# Altium PCB PCB1.PcbDoc
Units mm, origin at the board's own origin, x right, y up, seen from the top; angles counter-clockwise.
Board outline 152.4 x 101.6 mm, 2 copper layers (Top Layer, Bottom Layer); 63 components, 45 nets, 205 pads, 0 vias.
Unrouted connection lines stored in the file: 125.
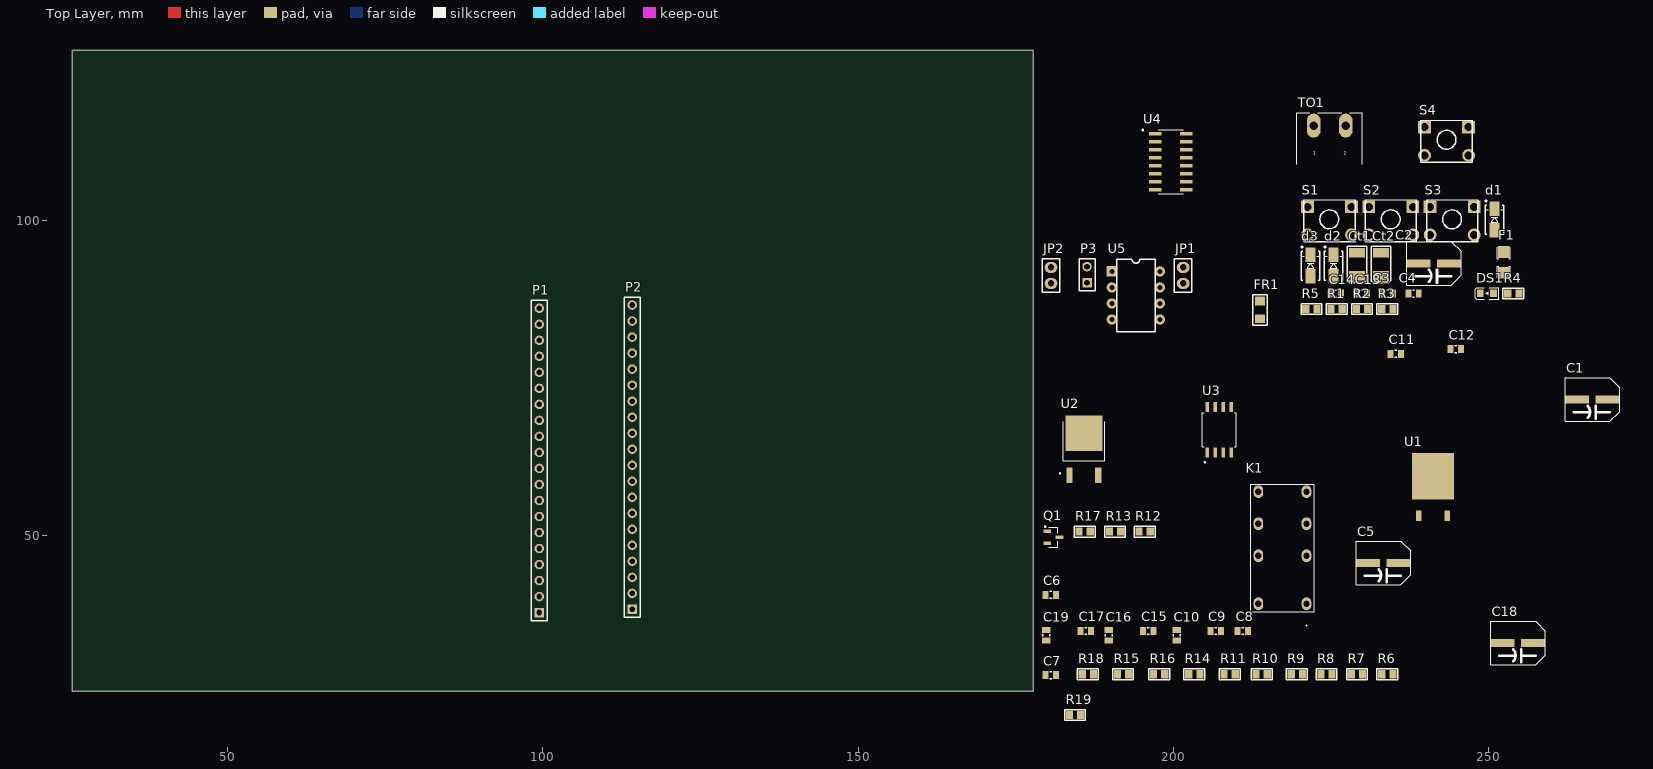
[diagram p0: Top Layer view]
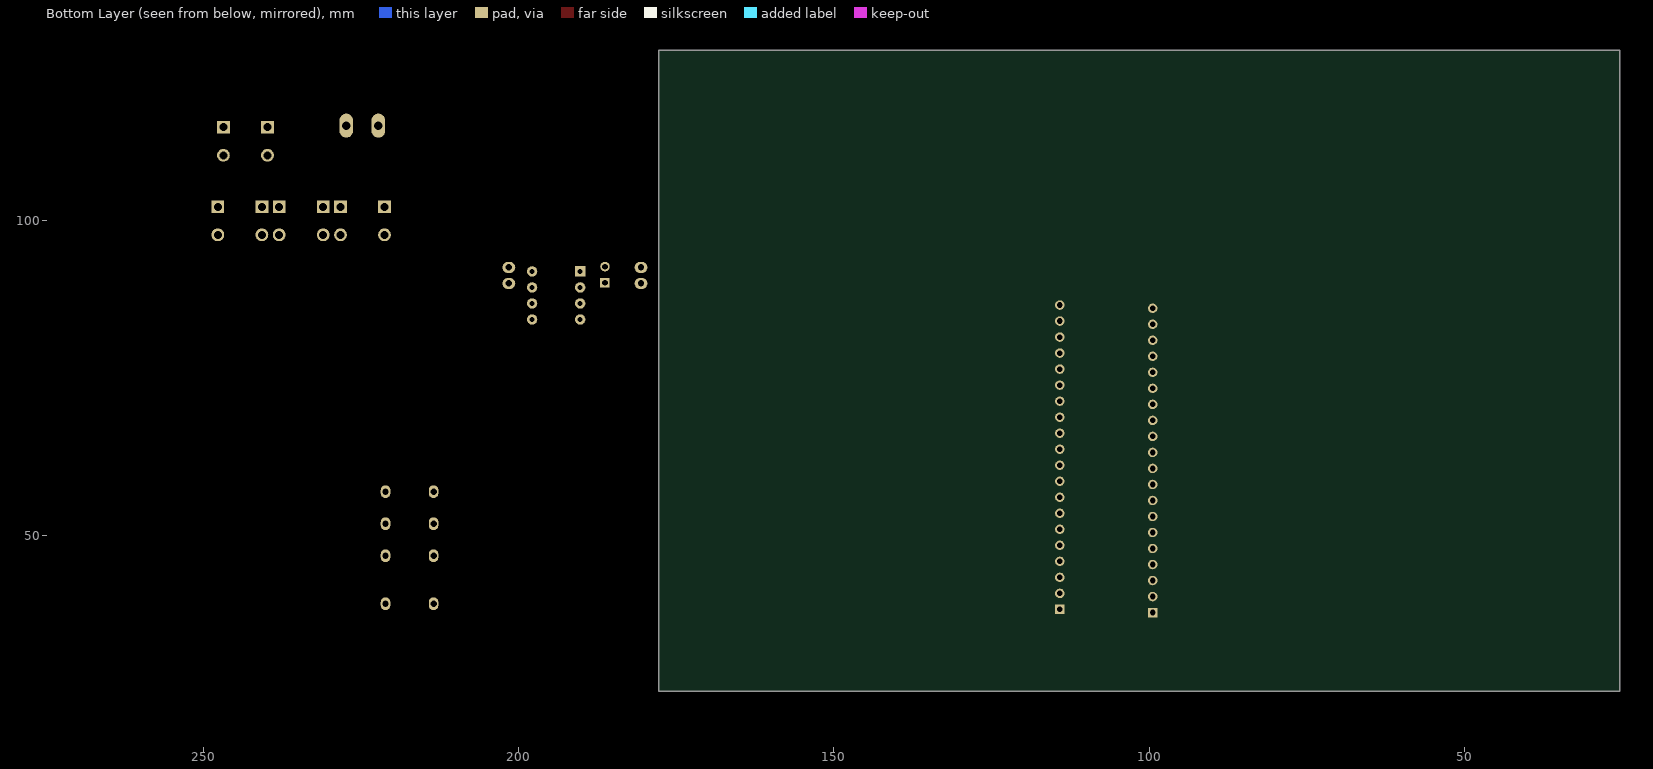
[diagram p1: Bottom Layer view, seen from below]

## Layer stack, top to bottom
Top Solder: solder mask 0.0102, Solder Resist, Dk 3.5
Top Layer: signal copper 0.0356
Dielectric 1: dielectric 0.32, FR-4, Dk 4.8
Bottom Layer: signal copper 0.0356
Bottom Solder: solder mask 0.0102, Solder Resist, Dk 3.5

## Board outline
25.4,25.4 177.8,25.4 177.8,127 25.4,127

## Design rules (kind name [scope] priority, off if disabled: settings)
Clearance [All] p1: gap=0.254 ignorepadtopadclearanceinfootprint=FALSE except(0: Arc-Hole Track-Hole SMDPad-Hole THPad-Hole Via-Hole Fill-Hole Poly-Hole Region-Hole Text-Hole)
PolygonConnect [All] p1: connectstyle=Relief reliefconductorwidth=0.254 reliefentries=4 polygonreliefangle="90 Angle" airgapwidth=0.254
RoutingVias [All] p1: holewidth=0.711 width=1.27 viastyle="Through Hole" minholewidth=0.711 minwidth=1.27 maxholewidth=0.711 maxwidth=1.27
SolderMaskExpansion [All] p1: expansion=0.102 istentingtop=FALSE
Width [All] p1: maxlimit=0.254 minlimit=0.254 preferedwidth=0.254
30 further rules are at their usual default settings.

## Classes and differential pairs
component class other: C8 C9 C10 C12 C13 C15 C16 C18 C19 JP1 JP2 K1 P3 Q1 R2 R4 R7 R8 R9 R10 R11 R12 R13 R14 R15 R16 R17 R18 R19 S1 S2 S3 S4 U4 U5
component class power: C1 C2 C3 C4 C5 C6 Ct1 Ct2 d1 d2 d3 DS1 F1 FR1 R1 TO1 U1 U2
component class MCU: C7 P1 P2 U3

## Components (designator, comment, footprint, x,y, rotation, side; value= is the part's Value field where it differs from the comment)
C1 "100uF, 25V" "Elko D8 package" 264.033,71.628 r0 top
C2 "100uF, 25V" "Elko D8 package" 238.887,93.218 r0 top
C3 "" CAP805 233.155,88.433 r0 top value=100nF
C4 "" CAP805 237.263,88.433 r0 top value=100nF
C5 "100uF, 25V" "Elko D8 package" 230.886,45.72 r0 top
C6 "" CAP805 179.705,40.64 r0 top value=100nF
C7 "" CAP805 179.705,27.94 r0 top value=100nF
C8 "" CAP805 210.185,34.925 r0 top value=100nF
C9 "" CAP805 205.867,34.925 r0 top value=1uF
C10 "" CAP805 200.533,33.401 r90 top value=1uF
C11 "" CAP805 234.459,78.862 r0 top value=100nF
C12 "" CAP805 243.967,79.629 r0 top value=100nF
C13 "" CAP805 229.047,88.433 r0 top value=100nF
C14 "" CAP805 224.939,88.433 r0 top value=100nF
C15 "" CAP805 195.199,34.925 r0 top value=1uF
C16 "" CAP805 189.738,33.401 r90 top value=1uF
C17 "" CAP805 185.293,34.925 r0 top value=100nF
C18 "100uF, 25V" "Elko D8 package" 252.222,33.02 r0 top
C19 "" CAP805 179.832,33.401 r90 top value=100nF
Ct1 "10uF" "Tantalium Size B" 229.113,93.066 r90 top
Ct2 "10uF" "Tantalium Size B" 232.925,93.066 r90 top
d1 "SS34" DIOM4629X24N 250.93,100.18 r90 top
d2 "Smbj12v" DIOM4629X24N 225.403,92.868 r90 top
d3 "Smbj3.3" DIOM4629X24N 221.745,92.868 r90 top
DS1 "Red" LED_SMD_0805 249.716,88.454 r0 top
F1 "F=1.0 A" "1206 FUSE" 252.399,93.391 r90 top
FR1 "Ferrit Bead" "1206 Ferrit Bead" 213.741,85.852 r90 top
JP1 "Jumper" "Jumper Small - 2.54 - GRAY" 201.549,91.313 r90 top
JP2 "Jumper" "Jumper Small - 2.54 - GRAY" 180.594,91.313 r90 top
K1 "G6A-234P-ST-US_5DC" G6A234PSTUS5DC 221.107,39.243 r90 top
P1 "Header 20" HDR1X20 99.441,37.846 r90 top
P2 "Header 20" HDR1X20 114.173,38.354 r90 top
P3 "Header 2" HDR1X2 186.309,90.17 r90 top
Q1 "BC817" SOT95P230X110-3N 180.975,49.784 r0 top
R1 "2.2k" "0805 Resistor" 225.906,86 r0 top
R2 "10k" "0805 Resistor" 229.916,86 r0 top
R3 "10k" "0805 Resistor" 233.926,86 r0 top
R4 "10k" "0805 Resistor" 253.904,88.458 r0 top
R5 "10k" "0805 Resistor" 221.896,86 r0 top
R6 "1.2k" "0805 Resistor" 233.934,28.067 r0 top
R7 "120 ohm" "0805 Resistor" 229.108,28.067 r0 top
R8 "2.2k" "0805 Resistor" 224.282,28.067 r0 top
R9 "22k" "0805 Resistor" 219.583,28.067 r0 top
R10 "10k" "0805 Resistor" 213.995,28.067 r0 top
R11 "10k" "0805 Resistor" 208.915,28.067 r0 top
R12 "33k" "0805 Resistor" 195.453,50.673 r0 top
R13 "10 ohm" "0805 Resistor" 190.754,50.673 r0 top
R14 "10k" "0805 Resistor" 203.327,28.067 r0 top
R15 "10k" "0805 Resistor" 192.024,28.067 r0 top
R16 "100k" "0805 Resistor" 197.739,28.067 r0 top
R17 "10k" "0805 Resistor" 185.928,50.673 r0 top
R18 "33k" "0805 Resistor" 186.436,28.067 r0 top
R19 "6.8k" "0805 Resistor" 184.404,21.59 r0 top
S1 "Switch PB" "Switch - Push to On" 224.755,99.978 r0 top
S2 "Switch PB" "Switch - Push to On" 234.484,99.978 r0 top
S3 "Switch PB" "Switch - Push to On" 244.212,99.978 r0 top
S4 "Switch PB" "Switch - Push to On" 243.329,112.595 r0 top
TO1 "PHOENIX" PH2P5.08 227.43,115.062 r0 top
U1 "LF33CDT" TO228P972X240-3N 241.173,59.309 r0 top
U2 "L7805CDT" VREG_L7805CDT 185.801,63.824 r0 top
U3 "W25Q64BVSSIG" SOIC127P790X216-8N 207.264,66.851 r90 top
U4 "MAX232CSE" SOIC127P600X175-16N 199.579,109.347 r0 top
U5 "OpAmp" DIP8 190.246,91.948 r0 top

## Footprints (in the part's own frame and the unit in brackets; to place one, negate y for a bottom-side part, rotate by r counter-clockwise, add the part's x,y. Pads: shape width x height; smd on the part's side, far side on the other; paste and mask are expansions set on the pad)
"0805 Resistor" [mil]
  rect 45x50 smd: 1(-35,0) 2(35,0)
  silkscreen extent -65,-33 65,33, body extent -39,-25 39,25, height 18
"1206 Ferrit Bead" [mil]
  rect 55x65 smd: 1(-55,0) 2(55,0)
  silkscreen extent -95,-45 95,45, body extent -63,-31 63,31, height 26
"1206 FUSE" [mm]
  rect 1.85x1.85 smd: 1(-1.65,0) 2(1.65,0)
  silkscreen extent -2.41,-1.02 2.41,1.02, body extent -1.6,-0.8 1.6,0.8, height 1
CAP805 [mm]
  rect 0.95x1.3 smd: 1(0,0) 2(1.65,0)
  silkscreen extent 0.67,-0.55 0.97,0.55, body extent -0.19,-0.64 1.84,0.63, height 0.65
DIOM4629X24N [mm]
  rect 2.3x1.6 smd: 1(-1.7,0) 2(1.7,0)
  silkscreen extent -2.3,-1.45 3.07,1.47, body extent -2.5,-1.22 2.5,1.48, height 2.2
DIP8 [mil]
  rect 65x65 hole 30: 1(0,0)
  round 65 hole 30: 2(0,-100) 3(0,-200) 4(0,-300) 5(300,-300) 6(300,-200) 7(300,-100) 8(300,0)
  silkscreen extent 30,-377 270,77, body extent -5,-375 305,75, height 165
"Elko D8 package" [mil]
  rect 150x50 smd: 1(0,0) 2(190,0)
  silkscreen extent -75,-135 265,135, body extent -43,-130 233,130, height 303
G6A234PSTUS5DC [mil]
  oval 80x60 hole 40: 1(0,0) 4(300,0) 6(500,0) 8(700,0) 9(700,300) 11(500,300) 13(300,300) 16(0,300)
  silkscreen extent -138,-50 745,348, body extent -50,-50 745,348, height 335
HDR1X2 [mm] "Connector; Header; 2 Position"
  rect 1.5x1.5 hole 0.9: 1(0,0)
  round 1.5 hole 0.9: 2(2.54,0)
  silkscreen extent -1.27,-1.27 3.81,1.27
HDR1X20 [mm] "Connector; Header; 20 Position"
  rect 1.5x1.5 hole 0.9: 1(0,0)
  round 1.5 hole 0.9: 2(2.54,0) 3(5.08,0) 4(7.62,0) 5(10.16,0) 6(12.7,0) 7(15.24,0) 8(17.78,0) 9(20.32,0) 10(22.86,0) 11(25.4,0) 12(27.94,0) 13(30.48,0) 14(33.02,0) 15(35.56,0) 16(38.1,0) 17(40.64,0) 18(43.18,0) 19(45.72,0) 20(48.26,0)
  silkscreen extent -1.27,-1.27 49.53,1.27
"Jumper Small - 2.54 - GRAY" [mil]
  oval 70x80 hole 40: 1(-50,0) 2(50,0)
  silkscreen extent -105,-55 105,55, body extent -100,-50 100,50, height 337
LED_SMD_0805 [mm]
  rect 1.1x1.2 smd: 1(-1.05,0) 2(1.05,0)
  silkscreen extent -1.85,-0.88 1.85,0.88, body extent -1,-0.62 1,0.63, height 0.7
PH2P5.08 [mm]
  oval 2.159x3.81 hole 1.4: 1(-5.18,0) 2(-0.1,0)
  silkscreen extent -7.84,-6.09 2.56,2.03, body extent -7.7,-10 2.46,2, height 8.63
SOIC127P600X175-16N [mm]
  rrect25% 1.97x0.59 smd: 1(-2.475,4.445) 2(-2.475,3.175) 3(-2.475,1.905) 4(-2.475,0.635) 5(-2.475,-0.635) 6(-2.475,-1.905) 7(-2.475,-3.175) 8(-2.475,-4.445) 9(2.475,-4.445) 10(2.475,-3.175) 11(2.475,-1.905) 12(2.475,-0.635) 13(2.475,0.635) 14(2.475,1.905) 15(2.475,3.175) 16(2.475,4.445)
  silkscreen extent -4.54,-5.06 2,5.13
SOIC127P790X216-8N [mm]
  rrect15% 1.61x0.58 smd: 1(-3.605,1.905) 2(-3.605,0.635) 3(-3.605,-0.635) 4(-3.605,-1.905) 5(3.605,-1.905) 6(3.605,-0.635) 7(3.605,0.635) 8(3.605,1.905)
  silkscreen extent -5.25,-2.69 2.67,2.69, body extent -3.95,-2.64 3.95,2.64, height 2.16
SOT95P230X110-3N [mm]
  rrect25% 1.26x0.59 smd: 1(-0.98,0.95) 2(-0.98,-0.95) 3(0.98,0)
  silkscreen extent -1.4,-1.56 0.7,1.8
"Switch - Push to On" [mil]
  rect 80x80 hole 50: 1(-137.5,87.5) 1(137.5,87.5)
  round 80 hole 50: 2(-137.5,-87.5) 2(137.5,-87.5)
  silkscreen extent -160,-130 160,130, body extent -155,-121 157,123, height 205
"Tantalium Size B" [mm]
  rect 1.5x2.5 smd paste+0.038 mask+0.038: 1(-1.831,0) 2(1.832,0)
  silkscreen extent -2.88,-1.53 2.88,1.53, body extent -1.83,-1.4 1.83,1.4, height 1.95
TO228P972X240-3N [mil]
  rect 37x67 smd: 1(-89,-240) 3(89,-240)
  rect 260x288 smd: 2(0,6)
  body extent -191,-128 191,128, height 94
VREG_L7805CDT [mm]
  rect 0.98x2.4 smd: 1(-2.28,-4.2) 2(2.28,-4.2)
  rect 5.86x5.57 smd paste-4: 3(0,2.47)
  silkscreen extent -3.89,-4 3.3,4.27, body extent -3.25,-4.6 3.25,5.13, height 2.4

## Part data
C1 C2 C5 C18: library part 865080142007, "WCAP-ASLI Aluminum Electrolytic Capacitor, V-Chip, SMT, D5xH5.5mm, 100uF, 6.3V", Capacitance=100uF, Capacitance Tolerance=+/-20%, Leakage Current=6.3uA, Manufacturer="Wurth Elektronik", Operating Temperature="-55 to +105degC", Rated Voltage=6.3VDC, Ripple Current=170mA, ComponentLink1Description=Manufacturer, ComponentLink1URL=http://www.we-online.de, ComponentLink2Description=Datasheet, ComponentLink2URL=https://www.we-online.com/catalog/datasheet/865080142007.pdf, Diameter=5mm, Dissipation Factor=24%, Endurance=2000h, Height=5.5mm, Manufacturer Part Number=865080142007, Mounting Technology=SMT, Packaging="Tape and Reel", Published Date="May 2020", Technical Reference=ASEC055101M6R3DVCTBB000
C3 C4 C6 C7 C8 C9 C10 C11 C12 C13 C14 C15 C16 C17 C19: library part Cap, "Capacitor", LatestRevisionDate=17-Jul-2002, LatestRevisionNote="Re-released for DXP Platform.", Published=8-Jun-2000, Publisher="Altium Limited"
Ct1 Ct2: library part "Capacitor Tantalium", "Tantalium Cap 10uF .... 100uF"
d1: library part "1n4007 SMD M7", "soutkey diod", Manufacturer="DC COMPONENTS", Data=16-12-2016, Designer="Abbas Basereh", Link=http://www.tme.eu/en/details/m7/smd-universal-diodes/dc-components/, Part. No=M7
d2 d3: library part "1n4007 SMD M7", "Smbj5.0", Manufacturer="DC COMPONENTS", Data=16-12-2016, Designer="Abbas Basereh", Link=http://www.tme.eu/en/details/m7/smd-universal-diodes/dc-components/, Part. No=M7
DS1: library part "LED SMD PACKAGE", "SMD Mono-color Chip LED Waterclear", Forward Voltage="3.2 V", Part Number=150080BS75000, Peak Wavelength="465 nm", Published Date="Jan 2017", Publisher="Ali Hafizi"
F1: library part "Fuse SMD1206", "SMD Fuses 1206", Data=16-12-2016, Desc.="SMD Fuses 1206", Designer="Abbas Basereh"
K1: "Relay or Contactor", Arrow Part Number="G6A-234P-ST-US 5DC", Manufacturer_Name="Omron Electronics", Arrow Price/Stock=https://www.arrow.com/en/products/g6a234pstus5dc/omron, Datasheet Link="https://componentsearchengine.com/Datasheets/2/G6A-234P-ST-US 5DC.pdf", Height=8.4mm, Manufacturer_Part_Number="G6A-234P-ST-US 5DC"
P1 P2: "Header, 20-Pin", LatestRevisionDate=17-Jul-2002, LatestRevisionNote="Re-released for DXP Platform.", Publisher="Altium Limited"
P3: "Header, 2-Pin", LatestRevisionDate=17-Jul-2002, LatestRevisionNote="Re-released for DXP Platform.", Publisher="Altium Limited"
Q1: "Transistor, Npn, 0.5a, 45v, Sot23", Package=None, Availability=Unavailable, MF="{'manufacturer': u'Rectron'}", MP=BC817, Price=None
R1 R2 R3 R4 R5 R6 R7 R8 R9 R10 R11 R14 R15 R16 R18 R19: library part "RES 0805 0.125W_1", "RES 0805", Data=16-12-2016, Desc.="RES SMD 0805", Designer="Abbas Basereh"
R12 R13 R17: library part "RES 0805 0.125W_5", "RES 0805", Data=16-12-2016, Desc.="RES SMD 0805", Designer="Abbas Basereh"
S1 S2 S3 S4: "Push Button Switch"
TO1: library part CON_Phoenix_MSTB_02, "2 Pitch: 5.08 mm Color: green Contact surface: Tin Assembly", Manufacturer="PHOENIX CONTACT", Max Current="12 A", Voltage="320 V", Category=Connector, ComponentLink1Description="Header, Nominal current: 12 A Rated voltage (III/2): 320 V Number of positions: 2 Pitch: 5.08 mm Color: green Contact surface: Tin Assembly: Soldering  DESIGNER:ABBAS BASEREH", ComponentLink2Description=Reference, Connector type="PCB Terminal Block", Designer="ABBAS BASEREH", Mounting Technology=Through-Hole, PART.NO=PHOENIX, Pin Count=2, Positions=2, Revision 1=2017-3-1, Status=Unreleased
U1: "LDO, 0.45VDO, 1A, 3.3V, 1%, 3TO252", Package=None, Availability=Unavailable, MF="{'manufacturer': u'STMicroelectronics'}", MP=LF33CDT, Price=None
U2 U4: Package=None, Availability=Unavailable, Price=None
  U2: MF="{'manufacturer': u'STMicroelectronics'}", MP=L7805CDT
  U4: MF="{'manufacturer': u'Analog Devices'}", MP=MAX232CSE
U3: "IC FLASH 64MBIT 80MHZ 8SOIC", Package=None, Availability=Unavailable, MF="{'manufacturer': u'Winbond Electronics'}", MP=W25Q64BVSSIG, Price=None
U5: "Dual Low Noise Operational Amplifier (OpAmp)"
JP1 JP2: Company=E.P.I.L, Defualt State=Close, Design Date=2011/11/02

## Nets (pads, with @x,y where several pads share a name; then routed paths per layer and width w, separated by ;. In a path a pad name is that pad's centre, name@x,y a point inside that pad or via, vN(x,y) a via of type N, cw(c..) or ccw(c..) an arc to the next point about the centre after c; other vN are vias at no path point)
+3v3: C4.2 C7.2 Ct2.1 d3.2 P1.18 P2.20 R2.2 R3.2 R4.2 R5.2 U1.3 U3.7 U3.8
+5V: C5.2 C6.2 C8.1 C9.1 R10.2 R14.2 U2.2 U4.16 U5.8
Accept_key: C11.2 P1.14 R2.1 S1.2
AGND: P3.1 R16.2 R19.2 U5.4
Aoudio_input: JP1.2 P1.8 R9.1 U5.1
Audio_output_swtich: P1.13 R12.1
Flash_CS: P1.9 U3.1
GND: C1.1 C2.1 C3.1 C4.1 C5.1 C6.1 C7.1 C8.2 C11.1 C12.1 C13.1 C14.1 C16.1 C17.2 Ct1.2 Ct2.2 d2.1 d3.1 P1.19 P1.20 P2.19 Q1.2 R1.1 R8.1 R15.1 R17.2 S1.1 S2.1 S3.1 S4.1 TO1.2 U1.2 U2.3 U3.4 U4.10 U4.15
input_voltag: C1.2 F1.1 TO1.1
NetC9_2: C9.2 U4.2
NetC10_1: C10.1 U4.3
NetC10_2: C10.2 U4.1
NetC15_1: C15.1 U4.5
NetC15_2: C15.2 U4.4
NetC16_2: C16.2 U4.6
NetC18_1: C18.1 R11.2
NetC18_2: C18.2 JP2.2
Netd1_1: d1.1 d2.2 F1.2
Netd1_2: d1.2 DS1.1 FR1.1
NetDS1_2: DS1.2 R1.2
NetJP1_1: JP1.1 JP2.1 P3.2 R10.1 R16.1
NetK1_16: K1.16 R13.1
NetQ1_1: Q1.1 R12.2 R17.1
NetQ1_3: Q1.3 R13.2
NetR6_2: R6.2 U4.12
NetR7_1: R7.1 U4.11
NetR9_2: R9.2 R11.1 U5.2
NetR14_1: R14.1 R18.1 U5.3
NetR18_2: R18.2 R19.1
pause_key: C12.2 R3.1 S2.2
play_key: C14.2 R5.1 S4.2
PMW: P1.11
PWM_after_filter: C19.1 K1.13 R15.2
Quectel_mic: K1.9
Record_key: C13.2 R4.1 S3.2
RX_out: R6.1 R8.2
Speaker_out: K1.11
Spi_clk: P2.12 U3.6
Spi_miso: P2.13 U3.2
Spi_mosi: P2.14 U3.5
TX_out: U4.14
Uart_CT: P2.9
Uart_rx: P2.8 U4.13
Uart_tx: P2.7 R7.2
Vin: C2.2 C3.2 C17.1 Ct1.1 FR1.2 K1.1 U1.1 U2.1
pads on no net: C19.2 K1.4 K1.6 K1.8 P1.1 P1.2 P1.3 P1.4 P1.5 P1.6 P1.7 P1.10 P1.12 P1.15 P1.16 P1.17 P2.1 P2.2 P2.3 P2.4 P2.5 P2.6 P2.10 P2.11 P2.15 P2.16 P2.17 P2.18 U3.3 U4.7 U4.8 U4.9 U5.5 U5.6 U5.7

## Silkscreen, mask and mechanical layers (free items; w line width, h text height)
Mechanical 3:
  lines w0.25: 98.171,36.576 98.171,87.376 115.57,87.376 115.57,36.576 98.171,36.576

## Text inside footprints (layer, text, board x,y; h text height)
TO1: Top Overlay "1" at 222.218,110.427 h0.51; Top Overlay "2" at 227.044,110.427 h0.51